# Altium PCB Main.PcbDoc (part 2 of 2)
Units mil, origin at the board's own origin, x right, y up, seen from the top; angles counter-clockwise.
Board outline 5500 x 3500 mil, 4 copper layers (Top Layer, Gnd 1, Interconnects, Gnd 2), stack 64.6 mil thick; 166 components, 135 nets, 540 pads, 1158 vias.
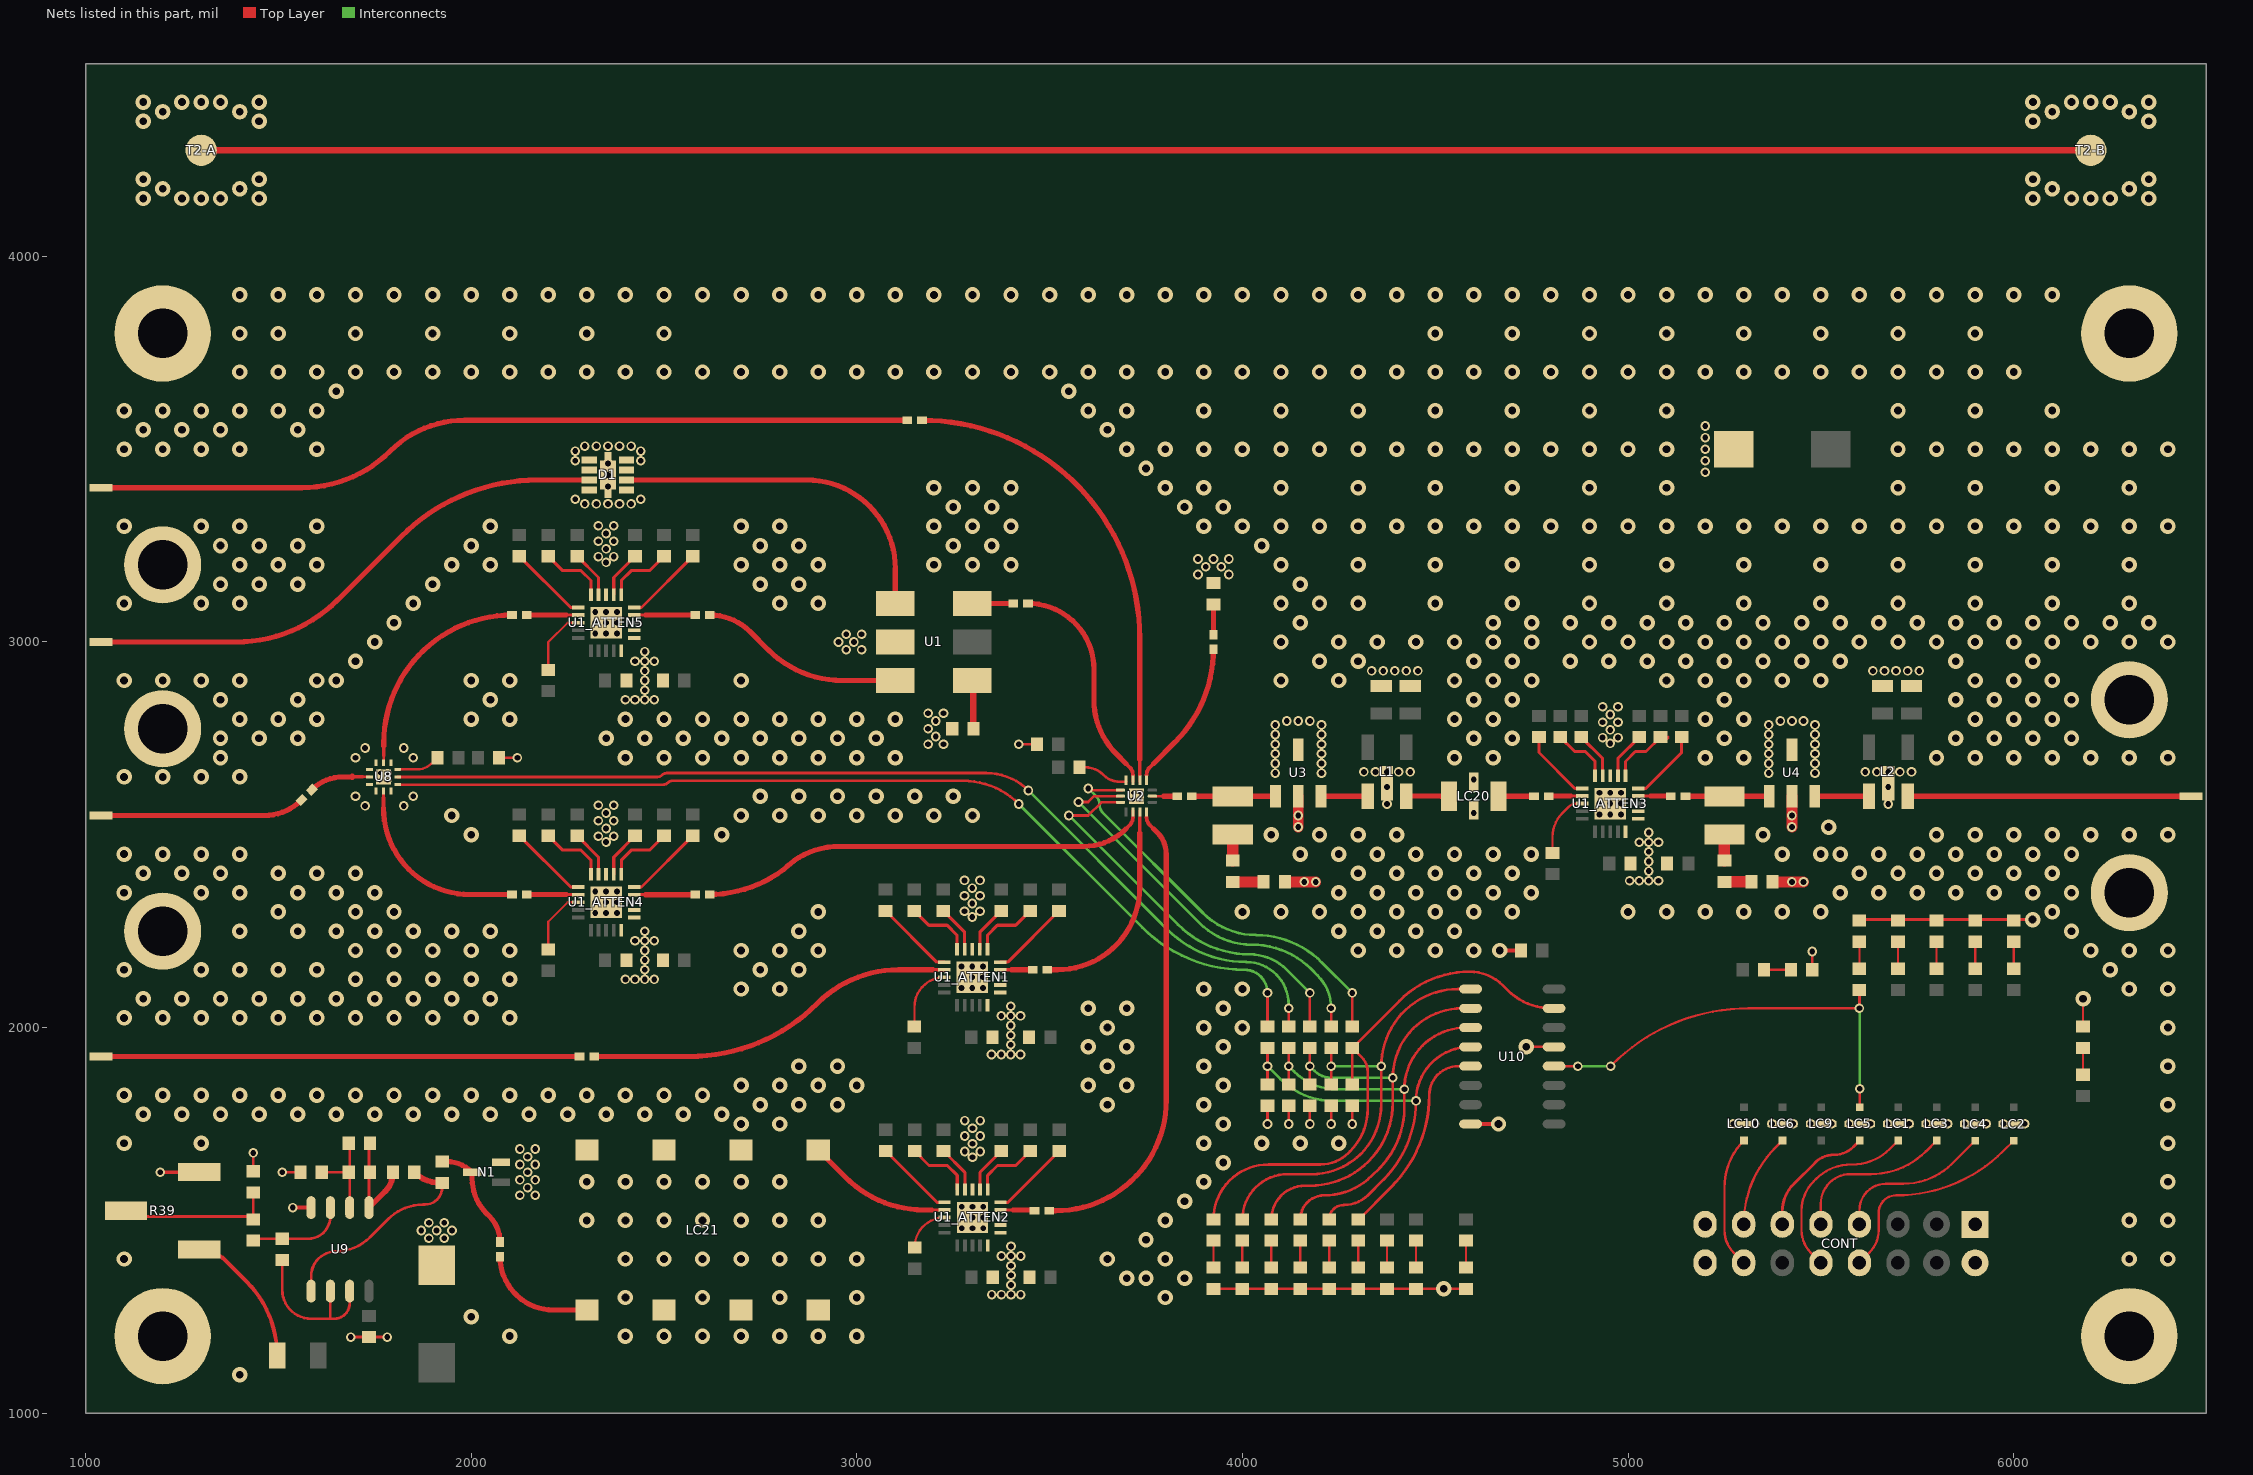
[diagram p4: the nets of this part, all layers, seen from the top]

## Via types
v1: diameter 40, hole 20, Top Layer to Gnd 2, tented both sides, 760 vias
v2: diameter 25, hole 15, Top Layer to Gnd 2, tented both sides, 345 vias
v3: diameter 25, hole 15, Top Layer to Gnd 2, 45 vias
v4: diameter 20, hole 10, Top Layer to Gnd 2, tented both sides, 4 vias
v5: diameter 22, hole 10, Top Layer to Gnd 2, tented bottom, 4 vias

## Nets (pads, with @x,y where several pads share a name; then routed paths per layer and width w, separated by ;. In a path a pad name is that pad's centre, name@x,y a point inside that pad or via, vN(x,y) a via of type N, cw(c..) or ccw(c..) an arc to the next point about the centre after c; other vN are vias at no path point) (continued)
GND: C4_ATTEN1.1 C4_ATTEN2.1 C4_ATTEN3.1 C4_ATTEN4.1 C4_ATTEN5.1 C6_ATTEN1.1 C6_ATTEN2.1 C6_ATTEN3.1 C6_ATTEN4.1 C6_ATTEN5.1 C9.1 C10.1 C12.1 C13.1 C18.1 C20.1 C21.1 C22.1 C23.1 C24.1 C25.1 C30.1 C32.1 C34.1 C40.2 C41.2 C60.2 C61.2 CONT.1 CONT.2 CONT.15 CONT.16 D1.1 D1.3 D1.4 D1.5 D1.6 D1.8 D1.9 D1.10 DP1.2 DP2.2 DP3.2 DP4.2 DP5.2 DP6.2 DP7.2 DP8.2 DP9.2 DP10.2 DP11.2 DP12.2 DP13.2 DP14.2 DP15.2 DP16.2 L1.5 L2.5 LC1.2 LC2.2 LC3.2 LC4.2 LC5.2 LC6.2 LC9.2 LC10.2 LC20.2 LC20.4 LC21.2 LC21.3 LC21.4 LC21.5 LC21.6 LC21.7 N1.2 pad.0 pad.1 R1.1 R2.1 R37.1 R39.3 T2-A.2 T2-A.3 T2-A.4 T2-A.5 T2-B.2 T2-B.3 T2-B.4 T2-B.5 U1.2 U1_ATTEN1.10 U1_ATTEN1.11 U1_ATTEN1.12 U1_ATTEN1.18 U1_ATTEN1.21 U1_ATTEN2.10 U1_ATTEN2.11 U1_ATTEN2.12 U1_ATTEN2.18 U1_ATTEN2.21 U1_ATTEN3.10 U1_ATTEN3.11 U1_ATTEN3.12 U1_ATTEN3.18 U1_ATTEN3.21 U1_ATTEN4.10 U1_ATTEN4.11 U1_ATTEN4.12 U1_ATTEN4.18 U1_ATTEN4.21 U1_ATTEN5.10 U1_ATTEN5.11 U1_ATTEN5.12 U1_ATTEN5.18 U1_ATTEN5.21 U2.15 U3.2 U3.4 U4.2 U4.4 U8.1 U8.3 U8.4 U8.6 U8.10 U8.12 U8.13 U9.4 U10.8 U10.13 | length 2415.4
  Top Layer w6: DP1.2@3925,1322.44 DP2.2@4000,1322.44 DP3.2@4075,1322.44 DP4.2@4150,1322.44 DP6.2@4300,1322.44 DP7.2@4375,1322.44 DP8.2@4450,1322.44 v1(4522.44,1322.44) DP9.2@4580,1322.44 ; v1(4735.83,1950) U10.13@4808.27,1950 ; DP10.2@6180,2002.56 v1(6180,2075)
  Top Layer w7: C32.1@1435,1627.56 v2(1435,1675) ; v2(1510,1625) R37.1@1557.44,1625 ; v2(1687.56,1197.44) C34.1@1735,1197.44 v2(1782.44,1197.44) ; C30.1@2072.56,2700 v2(2120,2700) ; v2(3420,2735) C20.1@3467.44,2735 ; v2(4065,1750) C24.1@4065,1797.44 ; v2(4120,1750) C25.1@4120,1797.44 ; v2(4175,1750) C23.1@4175,1797.44 ; v2(4230,1750) C22.1@4230,1797.44 ; v2(4285,1750) C21.1@4285,1797.44 ; DP16.2@5477.56,2150 v2(5477.56,2197.44)
  Top Layer w8: DP11.2@5599,2280.12 5674,2280.12 5749,2280.12 5824,2280.12 5899,2280.12 v1(6049,2280.12)
  Top Layer w10: v2(1193.56,1625) R39.3@1295,1625 ; v2(1537.56,1533.27) U9.4@1585,1533.27 ; U10.8@4591.73,1750 v1(4664.17,1750) ; v1(4667.56,2200) C18.1@4722.44,2200
  Top Layer w28: C60.2@4110.12,2377.8 v2(4190.12,2377.8) ; v2(4145,2520) U3.2@4145,2600 ; C61.2@5375,2377.8 v2(5455,2377.8) ; v2(5425,2520) U4.2@5425,2600
  other v1: 1400,1100 2100,1200 2400,1200 2500,1200 2600,1200 2700,1200 2800,1200 2900,1200 3000,1200 2000,1250 2400,1300 2600,1300 2800,1300 3000,1300 3800,1300 3700,1350 3750,1350 3850,1350 1100,1400 2400,1400 2500,1400 2600,1400 2700,1400 2800,1400 2900,1400 3000,1400 3650,1400 3800,1400 6300,1400 6400,1400 3750,1450 2300,1500 2400,1500 2500,1500 2600,1500 2700,1500 2800,1500 2900,1500 3800,1500 6300,1500 6400,1500 3850,1550 2300,1600 2400,1600 2500,1600 2600,1600 2700,1600 2800,1600 3900,1600 6400,1600 3950,1650 1100,1700 1300,1700 3900,1700 4050,1700 4150,1700 4250,1700 6400,1700 2700,1750 2800,1750 3950,1750 1150,1775 1250,1775 1350,1775 1450,1775 1550,1775 1650,1775 1750,1775 1850,1775 1950,1775 2050,1775 2150,1775 2250,1775 2350,1775 2450,1775 2550,1775 2650,1775 2750,1800 2850,1800 2950,1800 3650,1800 3900,1800 6400,1800 1100,1825 1200,1825 1300,1825 1400,1825 1500,1825 1600,1825 1700,1825 1800,1825 1900,1825 2000,1825 2100,1825 2200,1825 2300,1825 2400,1825 2500,1825 2600,1825 2700,1850 2800,1850 2900,1850 3000,1850 3600,1850 3700,1850 3950,1850 2850,1900 2950,1900 3650,1900 3900,1900 6400,1900 3600,1950 3700,1950 3950,1950 3650,2000 3900,2000 4000,2000 6400,2000 1100,2025 1200,2025 1300,2025 1400,2025 1500,2025 1600,2025 1700,2025 1800,2025 1900,2025 2000,2025 2100,2025 3600,2050 3700,2050 3950,2050 1150,2075 1250,2075 1350,2075 1450,2075 1550,2075 1650,2075 1750,2075 1850,2075 1950,2075 2050,2075 2700,2100 2800,2100 3900,2100 4000,2100 6300,2100 6400,2100 1700,2125 1800,2125 1900,2125 2000,2125 2100,2125 1100,2150 1300,2150 1400,2150 1500,2150 1600,2150 2750,2150 2850,2150 6250,2150 1700,2200 1800,2200 1900,2200 2000,2200 2100,2200 2700,2200 2800,2200 2900,2200 4300,2200 4400,2200 4500,2200 4600,2200 6200,2200 6300,2200 6400,2200 1400,2250 1550,2250 1650,2250 1750,2250 1850,2250 1950,2250 2050,2250 2850,2250 4250,2250 4350,2250 4450,2250 4550,2250 6150,2250 1500,2300 1700,2300 1800,2300 2900,2300 4000,2300 4100,2300 4200,2300 4300,2300 4400,2300 4500,2300 4600,2300 4700,2300 5000,2300 5100,2300 5200,2300 5300,2300 5400,2300 5500,2300 6100,2300 1100,2350 1300,2350 1400,2350 1550,2350 1650,2350 1750,2350 4250,2350 4350,2350 4450,2350 4550,2350 4650,2350 4749.02,2350 5550,2350 5650,2350 5750,2350 5850,2350 5950,2350 6050,2350 6150,2350 1150,2400 1250,2400 1350,2400 1500,2400 1600,2400 1700,2400 4300,2400 4400,2400 4500,2400 4600,2400 4700,2400 5600,2400 5700,2400 5800,2400 5900,2400 6000,2400 6100,2400 1100,2450 1200,2450 1300,2450 1400,2450 4150,2450 4250,2450 4350,2450 4450,2450 4550,2450 4650,2450 4749.02,2450 5400,2450 5500,2450 5550,2450 5650,2450 5750,2450 5850,2450 5950,2450 6050,2450 6150,2450 2000,2500 2650,2500 4075,2500 4200,2500 4300,2500 4400,2500 5350,2500 5800,2500 5900,2500 6000,2500 6100,2500 6200,2500 6300,2500 6400,2500 5520,2520 1950,2550 2700,2550 2800,2550 2900,2550 3000,2550 3100,2550 3200,2550 3300,2550 2750,2600 2850,2600 2950,2600 3050,2600 3150,2600 3250,2600 1100,2650 1200,2650 1300,2650 1400,2650 1350,2700 2400,2700 2500,2700 2600,2700 2700,2700 2800,2700 2900,2700 3000,2700 3100,2700 4550,2700 4650,2700 5200,2700 5300,2700 5800,2700 5900,2700 6000,2700 6100,2700 6200,2700 6300,2700 6400,2700 1350,2750 1450,2750 1550,2750 2350,2750 2450,2750 2550,2750 2650,2750 2750,2750 2850,2750 2950,2750 3050,2750 4600,2750 4700,2750 5250,2750 5850,2750 5950,2750 6050,2750 6150,2750 1400,2800 1500,2800 1600,2800 2000,2800 2100,2800 2400,2800 2500,2800 2600,2800 2700,2800 2800,2800 2900,2800 3000,2800 3100,2800 4550,2800 4650,2800 5200,2800 5300,2800 5900,2800 6000,2800 6100,2800 1350,2850 1550,2850 2050,2850 4600,2850 4700,2850 5250,2850 5850,2850 5950,2850 6050,2850 6150,2850 1100,2900 1200,2900 1300,2900 1400,2900 1600,2900 1650,2900 2000,2900 2100,2900 2700,2900 4100,2900 4250,2900 4550,2900 4650,2900 4750,2900 5100,2900 5200,2900 5300,2900 5400,2900 5500,2900 5900,2900 6000,2900 6100,2900 1700,2950 4200,2950 4300,2950 4600,2950 4700,2950 4850,2950 4950,2950 5050,2950 5150,2950 5250,2950 5350,2950 5450,2950 5550,2950 5850,2950 6050,2950 1750,3000 4100,3000 4250,3000 4350,3000 4450,3000 4550,3000 4650,3000 4750,3000 4900,3000 5000,3000 5100,3000 5200,3000 5300,3000 5400,3000 5500,3000 5600,3000 5700,3000 5800,3000 5900,3000 6000,3000 6100,3000 6200,3000 6300,3000 6400,3000 1800,3050 4150,3050 4650,3050 4750,3050 4850,3050 4950,3050 5050,3050 5150,3050 5250,3050 5350,3050 5450,3050 5550,3050 5650,3050 5750,3050 5850,3050 5950,3050 6050,3050 6150,3050 6250,3050 6350,3050 1100,3100 1300,3100 1400,3100 1850,3100 2800,3100 2900,3100 4100,3100 4200,3100 4300,3100 4500,3100 4700,3100 4900,3100 5100,3100 5300,3100 5500,3100 5700,3100 5900,3100 6100,3100 6300,3100 1350,3150 1450,3150 1550,3150 1900,3150 2750,3150 2850,3150 4150,3150 1400,3200 1500,3200 1600,3200 1950,3200 2050,3200 2700,3200 2800,3200 2900,3200 3200,3200 3300,3200 3400,3200 4100,3200 4300,3200 4500,3200 4700,3200 4900,3200 5100,3200 5300,3200 5500,3200 5700,3200 5900,3200 6100,3200 6300,3200 1350,3250 1450,3250 1550,3250 2000,3250 2750,3250 2850,3250 3250,3250 3350,3250 4050,3250 1100,3300 1300,3300 1400,3300 1600,3300 2050,3300 2700,3300 2800,3300 3200,3300 3300,3300 3400,3300 3900,3300 4000,3300 4100,3300 4200,3300 4300,3300 4400,3300 4500,3300 4600,3300 4700,3300 4800,3300 4900,3300 5000,3300 5100,3300 5200,3300 5300,3300 5400,3300 5500,3300 5600,3300 5700,3300 5800,3300 5900,3300 6000,3300 6100,3300 6200,3300 6300,3300 6400,3300 3250,3350 3350,3350 3850,3350 3950,3350 3200,3400 3300,3400 3400,3400 3800,3400 3900,3400 4100,3400 4300,3400 4500,3400 4700,3400 4900,3400 5100,3400 5700,3400 5900,3400 6100,3400 6300,3400 3750,3450 1100,3500 1200,3500 1300,3500 1400,3500 1600,3500 3700,3500 3800,3500 3900,3500 4000,3500 4100,3500 4200,3500 4300,3500 4400,3500 4500,3500 4600,3500 4700,3500 4800,3500 4900,3500 5000,3500 5100,3500 5700,3500 5800,3500 5900,3500 6000,3500 6100,3500 6200,3500 6300,3500 6400,3500 1150,3550 1250,3550 1350,3550 1550,3550 3650,3550 1100,3600 1200,3600 1300,3600 1400,3600 1500,3600 1600,3600 3600,3600 3700,3600 3900,3600 4100,3600 4300,3600 4500,3600 4700,3600 4900,3600 5100,3600 5700,3600 5900,3600 6100,3600 1650,3650 3550,3650 1400,3700 1500,3700 1600,3700 1700,3700 1800,3700 1900,3700 2000,3700 2100,3700 2200,3700 2300,3700 2400,3700 2500,3700 2600,3700 2700,3700 2800,3700 2900,3700 3000,3700 3100,3700 3200,3700 3300,3700 3400,3700 3500,3700 3600,3700 3700,3700 3800,3700 3900,3700 4000,3700 4100,3700 4200,3700 4300,3700 4400,3700 4500,3700 4600,3700 4700,3700 4800,3700 4900,3700 5000,3700 5100,3700 5200,3700 5300,3700 5400,3700 5500,3700 5600,3700 5700,3700 5800,3700 5900,3700 6000,3700 1400,3800 1500,3800 1700,3800 1900,3800 2100,3800 2300,3800 2500,3800 4500,3800 4700,3800 4900,3800 5100,3800 5300,3800 5500,3800 5700,3800 5900,3800 1400,3900 1500,3900 1600,3900 1700,3900 1800,3900 1900,3900 2000,3900 2100,3900 2200,3900 2300,3900 2400,3900 2500,3900 2600,3900 2700,3900 2800,3900 2900,3900 3000,3900 3100,3900 3200,3900 3300,3900 3400,3900 3500,3900 3600,3900 3700,3900 3800,3900 3900,3900 4000,3900 4100,3900 4200,3900 4300,3900 4400,3900 4500,3900 4600,3900 4700,3900 4800,3900 4900,3900 5000,3900 5100,3900 5200,3900 5300,3900 5400,3900 5500,3900 5600,3900 5700,3900 5800,3900 5900,3900 6000,3900 6100,3900 1150,4150 1250,4150 1300,4150 1350,4150 1450,4150 6050,4150 6150,4150 6200,4150 6250,4150 6350,4150 1150,4200 1450,4200 6050,4200 6350,4200 1150,4350 1450,4350 6050,4350 6350,4350 1150,4400 1250,4400 1300,4400 1350,4400 1450,4400 6050,4400 6150,4400 6200,4400 6250,4400 6350,4400
  other v2: 3350,1307.56 3375,1307.56 3400,1307.56 3425,1307.56 3400,1332.56 3400,1357.56 3400,1382.56 3375,1407.56 3400,1407.56 3425,1407.56 3400,1432.56 1890.44,1453.79 1930.44,1453.79 1870.44,1473.79 1910.44,1473.79 1950.44,1473.79 1890.44,1493.79 1930.44,1493.79 2126.34,1565 2166.34,1565 2146.34,1585 2126.34,1605 2166.34,1605 2146.34,1625 2126.34,1645 2166.34,1645 3300,1663.86 2146.34,1665 3280,1678.86 3320,1678.86 2126.34,1685 2166.34,1685 3300,1698.86 3280,1718.86 3320,1718.86 3300,1738.86 5273.39,1750.83 5328.5,1750.83 5373.39,1750.83 5428.5,1750.83 5473.39,1750.83 5528.5,1750.83 5573.39,1750.83 5628.5,1750.83 5673.39,1750.83 5728.5,1750.83 5773.39,1750.83 5828.5,1750.83 5873.39,1750.83 5928.5,1750.83 5973.39,1750.83 6028.5,1750.83 3280,1758.86 3320,1758.86 3349.43,1930.33 3374.43,1930.33 3399.43,1930.33 3424.43,1930.33 3399.43,1955.33 3399.43,1980.33 3399.43,2005.33 3374.43,2030.33 3399.43,2030.33 3424.43,2030.33 3399.43,2055.33 2400,2125 2425,2125 2450,2125 2475,2125 2450,2150 2450,2175 2450,2200 2425,2225 2450,2225 2475,2225 2450,2250 3299.43,2286.63 3279.43,2301.63 3319.43,2301.63 3299.43,2321.63 3279.43,2341.63 3319.43,2341.63 3299.43,2361.63 4160.12,2377.8 5425,2377.8 5004,2380.77 5029,2380.77 5054,2380.77 5079,2380.77 3279.43,2381.63 3319.43,2381.63 5054,2405.77 5054,2430.77 5054,2455.77 2350,2481.3 5029,2480.77 5054,2480.77 5079,2480.77 2330,2496.3 2370,2496.3 5054,2505.77 2350,2516.3 2330,2536.3 2370,2536.3 4145,2550 5425,2550 2350,2556.3 4600,2556.5 1725,2575 1825,2575 2330,2576.3 2370,2576.3 4375,2580 5675,2580 1700,2600 1850,2600 4375,2624 5675,2624 4600,2643.5 4085,2660 4205,2660 5365,2660 5485,2660 4315,2663 4345,2663 4375,2663 4405,2663 4435,2663 5615,2663 5645,2663 5675,2663 5705,2663 5735,2663 4085,2685 4205,2685 5365,2685 5485,2685 1700,2700 1850,2700 4085,2710 4205,2710 5365,2710 5485,2710 1725,2725 1825,2725 3185,2735 3225,2735 4085,2735 4205,2735 5365,2735 5485,2735 4954,2737.07 4934,2752.07 4974,2752.07 3205,2755 4085,2760 4205,2760 5365,2760 5485,2760 4954,2772.07 3185,2775 4085,2785 4205,2785 5365,2785 5485,2785 4934,2792.07 4974,2792.07 3205,2795 4115.02,2795 4145.02,2795 4175.02,2795 5395.02,2795 5425.02,2795 5455.02,2795 4954,2812.07 3185,2815 3225,2815 4934,2832.07 4974,2832.07 2400,2850 2425,2850 2450,2850 2475,2850 2450,2875 2450,2900 2450,2925 4335,2925 4365,2925 4395,2925 4425,2925 4455,2925 5635,2925 5665,2925 5695,2925 5725,2925 5755,2925 2425,2950 2450,2950 2475,2950 2450,2975 2972.56,2980 3012.56,2980 2952.56,3000 2992.56,3000 2972.56,3020 3012.56,3020 3885,3175 3965,3175 3905,3195 3945,3195 2350,3206.3 3885,3215 3925,3215 3965,3215 2330,3221.3 2370,3221.3 2350,3241.3 2330,3261.3 2370,3261.3 2350,3281.3 2330,3301.3 2370,3301.3 2294.71,3357.99 2324.71,3357.99 2354.71,3357.99 2384.71,3357.99 2414.71,3357.99 2269.71,3369.99 2439.71,3369.99 2354.71,3402.99 2354.71,3432.99 5200.12,3440 2354.71,3462.99 2269.71,3469.99 2439.71,3469.99 5200.12,3470 2269.71,3494.99 2439.71,3494.99 5200.12,3500 2294.71,3507.99 2324.71,3507.99 2354.71,3507.99 2384.71,3507.99 2414.71,3507.99 5200.12,3530 5200.12,3560
  other v3: 3272,1479.56 3300,1479.56 3328,1479.56 3272,1507.56 3300,1507.56 3328,1507.56 3272,1535.56 3300,1535.56 3328,1535.56 3271.43,2102.33 3299.43,2102.33 3327.43,2102.33 3271.43,2130.33 3299.43,2130.33 3327.43,2130.33 3271.43,2158.33 3299.43,2158.33 3327.43,2158.33 2322,2297 2350,2297 2378,2297 2322,2325 2350,2325 2378,2325 2322,2353 2350,2353 2378,2353 4926,2552.77 4954,2552.77 4982,2552.77 4926,2580.77 4954,2580.77 4982,2580.77 4926,2608.77 4954,2608.77 4982,2608.77 2322,3022 2350,3022 2378,3022 2322,3050 2350,3050 2378,3050 2322,3078 2350,3078 2378,3078
  other v4: 1763,2640 1783,2640 1763,2660 1783,2660
  other v5: 3716.13,2591.13 3733.87,2591.13 3716.13,2608.87 3733.87,2608.87
LV_CS_1: CONT.8 LC2.3 | length 564.5
  Top Layer w6: CONT.8@5600,1390 5625.25,1415.25 ; 5625.28,1415.28 ccw(c5565.5,1475) 5650,1475 5650,1520 cw(c5695,1520) 5651.49,1531.49 cw(c5695,1520) 5683.51,1563.51 cw(c5695,1520) 5695,1565 ccw(c5695,1959.26) 5973.73,1680.42 ccw(c5695,1959.26) 5973.78,1680.48 LC2.3@6000,1706.69
LV_CS_2: CONT.7 LC4.3 | length 414.3
  Top Layer w6: CONT.7@5600,1490 5600,1526.72 cw(c5668.28,1526.72) 5620,1575 cw(c5668.28,1526.72) 5668.28,1595 5714.15,1595 ccw(c5714.15,1774.02) 5840.71,1647.41 ; 5840.74,1647.43 LC4.3@5900,1706.69
LV_CS_3: CONT.10 LC1.3 | length 488.5
  Top Layer w6: CONT.10@5500,1390 5474.75,1415.25 cw(c5534.5,1475) 5450,1475 5450,1525 cw(c5558.64,1525) 5481.82,1601.82 5487.5,1607.5 cw(c5578.03,1516.97) 5578.03,1645 5581.69,1645 ccw(c5581.69,1781.87) 5678.44,1685.05 ccw(c5581.69,1781.87) 5678.47,1685.09 LC1.3@5700.63,1707.24
LV_CS_4: CONT.9 LC3.3 | length 425.1
  Top Layer w6: CONT.9@5500,1490 5500,1543.18 cw(c5576.82,1543.18) 5522.49,1597.49 cw(c5576.82,1543.18) 5576.82,1620 5630,1620 ccw(c5630,1821.31) 5772.31,1678.92 ccw(c5630,1821.31) 5772.35,1678.96 LC3.3@5800.63,1707.24
LV_CS_5: CONT.14 LC10.3 | length 347.9
  Top Layer w6: 5274.72,1415.28 cw(c5334.5,1475) 5250,1475 5250,1585.01 cw(c5422.86,1585.01) LC10.3@5300.63,1707.24 ; 5274.75,1415.25 CONT.14@5300,1390
MOSI: CONT.13 LC6.3 | length 246.8
  Top Layer w6: CONT.13@5300,1490 cw(c5581.53,1490) 5382.42,1689.04 cw(c5581.53,1490) 5382.46,1689.07 LC6.3@5400.63,1707.24
NetC1_1: C1.1 TONE.1 | length 1241
  Top Layer w13.45: TONE.1@1040,1925 C1.1@2280.98,1925
NetC1_2: C1.2 U1_ATTEN1.2 | length 967.9
  Top Layer w8: 3197.06,2150.02 U1_ATTEN1.2@3226.79,2150.02
  Top Layer w13.45: C1.2@2319.02,1925 2565.29,1925 ccw(c2565.29,2395.06) 2897.68,2062.68 cw(c3108.53,1851.83) 3108.53,2150.02 3197.06,2150.02
NetC2_1: C2.1 U1_ATTEN1.14 | length 74.7
  Top Layer w8: U1_ATTEN1.14@3372.06,2150.02 3401.79,2150.02
  Top Layer w13.45: 3401.79,2150.02 C2.1@3446.8,2150.02
NetC2_2: C2.2 U2.10 | length 560.8
  Top Layer w7: 3733.86,2545 U2.10@3733.86,2562.6
  Top Layer w10: 3733.86,2505 3733.86,2545
  Top Layer w13.45: C2.2@3494.02,2150 3520.28,2150 ccw(c3520.28,2363.58) 3733.86,2363.58 3733.86,2505
NetC3_1: C3.1 U1.6 | length 100
  Top Layer w13.45: U1.6@3300,3100 C3.1@3400,3100
NetC3_2: C3.2 U2.3 | length 592.3
  Top Layer w7: U2.3@3716.14,2637.4 3716.14,2655
  Top Layer w10: 3697.72,2685 3707.96,2674.76 cw(c3688.2,2655) 3716.14,2655
  Top Layer w13.45: C3.2@3444.02,3100 cw(c3444.02,2929.02) 3615,2929.02 3615,2850 ccw(c3813.65,2850) 3673.18,2709.53 3697.72,2685
NetC4_1: C4.1 R2.2 | length 78.4
  Top Layer w13.45: C4.1@3925,3019.02 R2.2@3925,3097.44
NetC4_2: C4.2 U2.1 | length 399.6
  Top Layer w7: U2.1@3751.57,2637.4 3751.57,2655
  Top Layer w10: 3751.57,2655 cw(c3779.52,2655) 3759.76,2674.76 3770,2685
  Top Layer w13.45: 3770,2685 3825.31,2740.31 ccw(c3584.63,2980.98) C4.2@3925,2980.98
NetC5_1: C5.1 N1.3 R3.1 | length 286.4
  Top Layer w13.45: R3.1@1936.07,1652.56 cw(c1936.07,1558.47) N1.3@2002.6,1625 2002.6,1608.3 ccw(c2130.3,1608.3) 2040,1518 2047.43,1510.57 cw(c1980.88,1444.02) C5.1@2075,1444.02
  Top Layer w15: R3.1@1925,1652.56 R3.1@1936.07,1652.56
NetC5_2: C5.2 LC21.1 | length 304
  Top Layer w13.45: C5.2@2075,1405.98 ccw(c2213.48,1405.98) 2213.48,1267.5 LC21.1@2300,1267.5
NetC6_1: C6.1 U1_ATTEN2.14 | length 74.7
  Top Layer w8: U1_ATTEN2.14@3372.64,1527.24 3402.36,1527.24
  Top Layer w13.45: 3404.98,1527.24 C6.1@3450,1527.24
NetC6_2: C6.2 U2.11 | length 1234.7
  Top Layer w7: 3751.57,2545 U2.11@3751.57,2562.6
  Top Layer w10: 3751.57,2545 ccw(c3779.52,2545) 3759.76,2525.24 3770,2515
  Top Layer w13.45: C6.2@3499.02,1525 3515.52,1525 ccw(c3515.52,1812.2) 3802.72,1812.2 3802.72,2450 ccw(c3724.78,2450) 3779.89,2505.11 3770,2515
NetC7_1: C7.1 EMI_IN.1 | length 2137.8
  Top Layer w13.45: EMI_IN.1@1040,3400 1560.65,3400 ccw(c1560.65,3724.35) 1790,3495 cw(c1983.14,3301.86) 1983.14,3575 C7.1@3130.98,3575
NetC7_2: C7.2 U2.2 | length 1260
  Top Layer w7: U2.2@3733.86,2637.4 3733.86,2655
  Top Layer w10: 3733.86,2655 3733.86,2695
  Top Layer w13.45: C7.2@3169.02,3575 cw(c3169.02,3010.16) 3733.86,3010.16 3733.86,2695
NetC8_1: C8.1 U2.13 | length 68.6
  Top Layer w7: U2.13@3762.4,2600 3795,2600
  Top Layer w13.45: 3795,2600 C8.1@3830.98,2600
NetC8_2: C8.2 L3.1 U3.1 | length 217
  Top Layer w13.45: C8.2@3869.02,2600 U3.1@4086,2600
NetC14_1: C14.1 U1_ATTEN3.14 | length 81.7
  Top Layer w8: U1_ATTEN3.14@5026.64,2600.46 5056.36,2600.46
  Top Layer w13.45: 5058.98,2600.46 C14.1@5110.98,2600.46
NetC14_2: C14.2 L4.1 U4.1 | length 217
  Top Layer w13.45: C14.2@5149.02,2600 5293.03,2600.01 U4.1@5366,2600
NetC15_1: C15.1 U8.11 | length 572.4
  Top Layer w7: U8.11@1773.43,2687.4 1773.43,2705
  Top Layer w10: 1773.43,2705 1773.43,2731.06
  Top Layer w13.45: 1773.43,2731.06 1773.43,2737.44 cw(c2105.98,2737.44) C15.1@2105.98,3070
NetC15_2: C15.2 U1_ATTEN5.2 | length 133.7
  Top Layer w8: 2247.64,3069.68 U1_ATTEN5.2@2277.36,3069.68
  Top Layer w13.45: C15.2@2144.02,3070 2247.64,3070
  Top Layer w13.96: C15.2@2144.02,3069.68 C15.2@2144.02,3070
NetC16_1: C16.1 U1_ATTEN5.14 | length 158
  Top Layer w8: U1_ATTEN5.14@2422.64,3069.68 2452.36,3069.68
  Top Layer w13.45: 2452.36,3069.68 C16.1@2580.67,3069.68
NetC16_2: C16.2 U1.3 | length 533.3
  Top Layer w13.45: C16.2@2619.02,3070 cw(c2619.02,2922.77) 2723.12,3026.88 2770,2980 ccw(c2963.14,3173.14) 2963.14,2900 U1.3@3100,2900
NetC17_1: C17.1 U8.5 | length 504.9
  Top Layer w7: 1772.57,2595 U8.5@1772.57,2612.6
  Top Layer w10: 1772.57,2568.94 1772.57,2595
  Top Layer w13.45: 1772.57,2568.93 ccw(c1996.52,2568.94) 1996.52,2345 C17.1@2105.98,2345
NetC17_2: C17.2 U1_ATTEN4.2 | length 133.3
  Top Layer w8: 2247.64,2344.68 U1_ATTEN4.2@2277.36,2344.68
  Top Layer w13.45: C17.2@2144.02,2345 2247.64,2345
NetC19_1: C19.1 U1_ATTEN4.14 | length 158
  Top Layer w8: U1_ATTEN4.14@2422.64,2344.68 2452.36,2344.68
  Top Layer w13.45: 2452.36,2344.68 C19.1@2580.67,2344.68
NetC19_2: C19.2 U2.9 | length 1178.2
  Top Layer w7: 3716.14,2545 U2.9@3716.14,2562.6
  Top Layer w10: 3697.72,2515 3707.96,2525.24 ccw(c3688.2,2545) 3716.14,2545
  Top Layer w13.45: C19.2@2615.65,2345 ccw(c2615.65,2669.35) 2810.94,2410.38 cw(c2954.87,2266.45) 2837.56,2432.8 cw(c2954.87,2266.45) 2954.87,2470 3589.19,2470 ccw(c3589.19,2623.37) 3697.64,2514.92
NetC27_1: C27.1 OSC.1 | length 530.5
  Top Layer w13.45: OSC.1@1040,2550 1463.67,2550 ccw(c1463.67,2685.99) C27.1@1559.83,2589.83
NetC27_2: C27.2 U8.2 | length 158.2
  Top Layer w7: 1718,2650.43 U8.2@1735.6,2650.43
  Top Layer w10: 1691.94,2650.43 1718,2650.43
  Top Layer w13.45: C27.2@1586.72,2616.72 cw(c1667.06,2536.39) 1667.06,2650 1691.94,2650
  Top Layer w17: 1691.94,2650 1691.94,2650.43
NetC28_1: C28.1 LC20.3 | length 92
  Top Layer w13.45: LC20.3@4664,2600 C28.1@4755.98,2600
NetC28_2: C28.2 U1_ATTEN3.2 | length 86.4
  Top Layer w8: 4851.64,2600.46 U1_ATTEN3.2@4881.36,2600.46
  Top Layer w13.45: C28.2@4795,2600.46 4851.64,2600.46
NetC31_1: C31.1 R32.1 R37.2 U9.2 | length 240.2
  Top Layer w7: R37.2@1612.56,1625 C31.1@1682.44,1625 C31.1@1685,1625 ; R32.1@1682.44,1700 1685,1697.44 C31.1@1685,1625 ; U9.2@1685,1533.27 C31.1@1685,1625
NetC31_2: C31.2 R32.2 R36.2 U9.1 | length 282.3
  Top Layer w7: U9.1@1735,1533.27 1735,1697.44 R32.2@1737.56,1700
  Top Layer w15: U9.1@1735,1533.27 1776.73,1575 ccw(c1726.73,1625) R36.2@1797.44,1625
NetC32_2: C32.2 R33.1 R39.2 | length 409.2
  Top Layer w7: R39.2@1105,1525 1120,1510 1427.56,1510 R33.1@1435,1502.56 C32.2@1435,1572.44
NetC60_1: C60.1 R60.2 | length 80
  Top Layer w28: R60.2@3975,2377.8 C60.1@4055,2377.8
NetC61_1: C61.1 R61.2 | length 69.9
  Top Layer w30: R61.2@5250,2377.8 C61.1@5319.88,2377.8
NetD1_2: D1.2 IN.1 | length 1407.4
  Top Layer w13.45: IN.1@1040,3000 1390,3000 ccw(c1390,3374.2) 1654.6,3109.6 1818.55,3273.55 cw(c2172.11,2920) 2172.11,3420 D1.2@2311.01,3420
NetD1_7: D1.7 U1.1 | length 922.9
  Top Layer w13.45: D1.7@2398.41,3420 2870,3420 cw(c2870,3190) 3100,3190 U1.1@3100,3100
NetDP1_1: DP1.1 RL1.2 | length 69.9
  Top Layer w6: DP1.1@3925,1377.56 RL1.2@3925,1447.44
NetDP2_1: DP2.1 RL2.2 | length 69.9
  Top Layer w6: DP2.1@4000,1377.56 RL2.2@4000,1447.44
NetDP3_1: DP3.1 RL3.2 | length 69.9
  Top Layer w6: DP3.1@4075,1377.56 RL3.2@4075,1447.44
NetDP4_1: DP4.1 RL4.2 | length 69.9
  Top Layer w6: DP4.1@4150,1377.56 RL4.2@4150,1447.44
NetDP5_1: DP5.1 RL5.2 | length 69.9
  Top Layer w6: DP5.1@4225,1377.56 RL5.2@4225,1447.44
NetDP6_1: DP6.1 RL6.2 | length 69.9
  Top Layer w6: DP6.1@4300,1377.56 RL6.2@4300,1447.44
NetDP7_1: DP7.1 RL7.2 | length 69.9
  Top Layer w6: DP7.1@4375,1377.56 RL7.2@4375,1447.44
NetDP8_1: DP8.1 RL8.2 | length 69.9
  Top Layer w6: DP8.1@4450,1377.56 RL8.2@4450,1447.44
NetDP9_1: DP9.1 RL9.2 | length 69.9
  Top Layer w6: DP9.1@4580,1377.56 RL9.2@4580,1447.44
NetDP10_1: DP10.1 RL10.2 | length 69.9
  Top Layer w6: RL10.2@6180,1877.56 DP10.1@6180,1947.44
NetDP11_1: DP11.1 RL11.2 | length 69.9
  Top Layer w6: RL11.2@5600,2152.56 DP11.1@5600,2222.44
NetDP12_1: DP12.1 RL12.2 | length 69.9
  Top Layer w6: RL12.2@5800,2152.56 DP12.1@5800,2222.44
NetDP13_1: DP13.1 RL13.2 | length 69.9
  Top Layer w6: RL13.2@5900,2152.56 DP13.1@5900,2222.44
NetDP14_1: DP14.1 RL14.2 | length 69.9
  Top Layer w6: RL14.2@6000,2152.56 DP14.1@6000,2222.44
NetDP15_1: DP15.1 RL15.2 | length 69.9
  Top Layer w6: RL15.2@5700,2152.56 DP15.1@5700,2222.44
NetDP16_1: DP16.1 RL16.2 | length 69.9
  Top Layer w6: RL16.2@5352.56,2150 DP16.1@5422.44,2150
NetL1_1: L1.1 U3.3 | length 121
  Top Layer w13.45: U3.3@4204,2600 L1.1@4325,2600
NetL1_2: L1.2 LC20.1 | length 90
  Top Layer w13.45: L1.2@4425,2600.46 4515,2600
NetL2_1: L2.1 U4.3 | length 126
  Top Layer w13.45: U4.3@5484,2600 L2.1@5610,2600
NetL2_2: L2.2 OUT.1 | length 735
  Top Layer w13.45: L2.2@5725,2600 5968.7,2600.01 OUT.1@6460,2600
NetL3_2: L3.2 R60.1 | length 68.1
  Top Layer w30: R60.1@3975,2432.91 L3.2@3975,2500.98
NetL4_2: L4.2 R61.1 | length 68.1
  Top Layer w30: R61.1@5250,2432.91 L4.2@5250,2500.98
NetLC21_8: LC21.8 U1_ATTEN2.2 | length 376.7
  Top Layer w8: 3197.64,1527.24 U1_ATTEN2.2@3227.36,1527.24
  Top Layer w13.45: LC21.8@2900,1682.5 2971.29,1611.21 ccw(c3174,1813.92) 3174,1527.24 3195.02,1527.24
NetR1_2: R1.2 U1.4 | length 118.8
  Top Layer w17: R1.2@3302.56,2775 U1.4@3302.56,2893.82
NetR1_ATTEN1_1: R1_ATTEN1.1 U1_ATTEN1.17 | length 122.7
  Top Layer w8: U1_ATTEN1.17@3319.11,2202.97 3319.11,2247.46 R1_ATTEN1.1@3374.43,2302.77
NetR1_ATTEN2_1: R1_ATTEN2.1 U1_ATTEN2.17 | length 122.7
  Top Layer w8: U1_ATTEN2.17@3319.69,1580.2 3319.69,1624.69 R1_ATTEN2.1@3375,1680
NetR1_ATTEN3_1: R1_ATTEN3.1 U1_ATTEN3.17 | length 122.7
  Top Layer w8: U1_ATTEN3.17@4973.69,2653.41 4973.69,2697.9 R1_ATTEN3.1@5029,2753.21
NetR1_ATTEN4_1: R1_ATTEN4.1 U1_ATTEN4.17 | length 122.7
  Top Layer w8: U1_ATTEN4.17@2369.68,2397.64 2369.68,2442.13 R1_ATTEN4.1@2425,2497.44
NetR1_ATTEN5_1: R1_ATTEN5.1 U1_ATTEN5.17 | length 122.7
  Top Layer w8: U1_ATTEN5.17@2369.68,3122.64 2369.68,3167.13 R1_ATTEN5.1@2425,3222.44
NetR2_ATTEN1_1: R2_ATTEN1.1 U1_ATTEN1.15 | length 207.5
  Top Layer w8: U1_ATTEN1.15@3372.06,2169.7 3391.35,2169.7 R2_ATTEN1.1@3524.43,2302.77
NetR2_ATTEN2_1: R2_ATTEN2.1 U1_ATTEN2.15 | length 207.5
  Top Layer w8: U1_ATTEN2.15@3372.64,1546.93 3391.93,1546.93 R2_ATTEN2.1@3525,1680
NetR2_ATTEN3_1: R2_ATTEN3.1 U1_ATTEN3.15 | length 190.9
  Top Layer w8: U1_ATTEN3.15@5026.64,2620.14 5045.93,2620.14 5139,2713.21 R2_ATTEN3.1@5139,2753.21
NetR2_ATTEN4_1: R2_ATTEN4.1 U1_ATTEN4.15 | length 207.5
  Top Layer w8: U1_ATTEN4.15@2422.64,2364.37 2441.93,2364.37 R2_ATTEN4.1@2575,2497.44
NetR2_ATTEN5_1: R2_ATTEN5.1 U1_ATTEN5.15 | length 207.5
  Top Layer w8: U1_ATTEN5.15@2422.64,3089.37 2441.93,3089.37 R2_ATTEN5.1@2575,3222.44
NetR3_2: R3.2 R36.1 U9.5 | length 571.5
  Top Layer w7: U9.5@1585,1316.73 1585,1355 cw(c1650,1355) 1650,1420 ccw(c1650,1543.12) 1737.06,1456.06 1784,1503 cw(c1875.74,1411.26) 1839.22,1535.76 cw(c1875.74,1411.26) 1875.74,1541 1880,1541 ccw(c1880,1586) 1925,1586 R3.2@1925,1597.44
  Top Layer w15: R36.1@1852.56,1625 ccw(c1919.09,1691.53) 1919.09,1597.44 R3.2@1925,1597.44
NetR3_ATTEN1_1: R3_ATTEN1.1 U1_ATTEN1.16 | length 173.5
  Top Layer w8: U1_ATTEN1.16@3338.8,2202.97 3338.8,2239.7 3364.43,2265.33 3411.98,2265.33 R3_ATTEN1.1@3449.43,2302.77
NetR3_ATTEN2_1: R3_ATTEN2.1 U1_ATTEN2.16 | length 173.5
  Top Layer w8: U1_ATTEN2.16@3339.37,1580.2 3339.37,1616.93 3365,1642.56 3412.56,1642.56 R3_ATTEN2.1@3450,1680
NetR3_ATTEN3_1: R3_ATTEN3.1 U1_ATTEN3.16 | length 167.6
  Top Layer w8: U1_ATTEN3.16@4993.37,2653.41 4993.37,2690.14 5019,2715.77 5046.56,2715.77 R3_ATTEN3.1@5084,2753.21 ; R3_ATTEN3.1@5094,2743.21 5104,2753.21
NetR3_ATTEN4_1: R3_ATTEN4.1 U1_ATTEN4.16 | length 173.5
  Top Layer w8: U1_ATTEN4.16@2389.37,2397.64 2389.37,2434.37 2415,2460 2462.56,2460 R3_ATTEN4.1@2500,2497.44
NetR3_ATTEN5_1: R3_ATTEN5.1 U1_ATTEN5.16 | length 173.5
  Top Layer w8: U1_ATTEN5.16@2389.37,3122.64 2389.37,3159.37 2415,3185 2462.56,3185 R3_ATTEN5.1@2500,3222.44
NetR4_ATTEN1_1: R4_ATTEN1.1 U1_ATTEN1.1 | length 207.5
  Top Layer w8: R4_ATTEN1.1@3074.43,2302.77 3207.5,2169.7 U1_ATTEN1.1@3226.79,2169.7
NetR4_ATTEN2_1: R4_ATTEN2.1 U1_ATTEN2.1 | length 207.5
  Top Layer w8: R4_ATTEN2.1@3075,1680 3208.07,1546.93 U1_ATTEN2.1@3227.36,1546.93
NetR4_ATTEN3_1: R4_ATTEN3.1 U1_ATTEN3.1 | length 190.9
  Top Layer w8: R4_ATTEN3.1@4769,2753.21 4769,2713.21 4862.07,2620.14 U1_ATTEN3.1@4881.36,2620.14
NetR4_ATTEN4_1: R4_ATTEN4.1 U1_ATTEN4.1 | length 207.5
  Top Layer w8: R4_ATTEN4.1@2125,2497.44 2258.07,2364.37 U1_ATTEN4.1@2277.36,2364.37
NetR4_ATTEN5_1: R4_ATTEN5.1 U1_ATTEN5.1 | length 207.5
  Top Layer w8: R4_ATTEN5.1@2125,3222.44 2258.07,3089.37 U1_ATTEN5.1@2277.36,3089.37
NetR5_ATTEN1_1: R5_ATTEN1.1 U1_ATTEN1.19 | length 122.7
  Top Layer w8: R5_ATTEN1.1@3224.43,2302.77 3279.74,2247.46 U1_ATTEN1.19@3279.74,2202.97
NetR5_ATTEN2_1: R5_ATTEN2.1 U1_ATTEN2.19 | length 122.7
  Top Layer w8: R5_ATTEN2.1@3225,1680 3280.32,1624.68 U1_ATTEN2.19@3280.32,1580.2
NetR5_ATTEN3_1: R5_ATTEN3.1 U1_ATTEN3.19 | length 122.7
  Top Layer w8: R5_ATTEN3.1@4879,2753.21 4934.32,2697.9 U1_ATTEN3.19@4934.32,2653.41
NetR5_ATTEN4_1: R5_ATTEN4.1 U1_ATTEN4.19 | length 122.7
  Top Layer w8: R5_ATTEN4.1@2275,2497.44 2330.32,2442.13 U1_ATTEN4.19@2330.32,2397.64
NetR5_ATTEN5_1: R5_ATTEN5.1 U1_ATTEN5.19 | length 122.7
  Top Layer w8: R5_ATTEN5.1@2275,3222.44 2330.32,3167.13 U1_ATTEN5.19@2330.32,3122.64
NetR6_ATTEN1_1: R6_ATTEN1.1 U1_ATTEN1.20 | length 173.5
  Top Layer w8: R6_ATTEN1.1@3149.43,2302.77 3186.87,2265.33 3234.43,2265.33 3260.06,2239.7 U1_ATTEN1.20@3260.06,2202.97
NetR6_ATTEN2_1: R6_ATTEN2.1 U1_ATTEN2.20 | length 173.5
  Top Layer w8: R6_ATTEN2.1@3150,1680 3187.44,1642.56 3235,1642.56 3260.63,1616.93 U1_ATTEN2.20@3260.63,1580.2
NetR6_ATTEN3_1: R6_ATTEN3.1 U1_ATTEN3.20 | length 153.5
  Top Layer w8: R6_ATTEN3.1@4824,2753.21 4861.44,2715.77 4889,2715.77 4914.63,2690.14 U1_ATTEN3.20@4914.63,2653.41
NetR6_ATTEN4_1: R6_ATTEN4.1 U1_ATTEN4.20 | length 173.5
  Top Layer w8: R6_ATTEN4.1@2200,2497.44 2237.44,2460 2285,2460 2310.63,2434.37 U1_ATTEN4.20@2310.63,2397.64
NetR6_ATTEN5_1: R6_ATTEN5.1 U1_ATTEN5.20 | length 173.5
  Top Layer w8: R6_ATTEN5.1@2200,3222.44 2237.44,3185 2285,3185 2310.63,3159.37 U1_ATTEN5.20@2310.63,3122.64
NetR7_ATTEN1_1: R7_ATTEN1.1 U1_ATTEN1.3 | length 171.9
  Top Layer w6: R7_ATTEN1.1@3149.44,2002.56 3149.44,2052.98 cw(c3226.79,2052.98) 3158.22,2088.78 cw(c3226.79,2052.98) 3190.99,2121.55 cw(c3226.79,2052.98) U1_ATTEN1.3@3226.79,2130.33
NetR7_ATTEN2_1: R7_ATTEN2.1 U1_ATTEN2.3 | length 121.9
  Top Layer w6: R7_ATTEN2.1@3150.02,1429.79 3150.02,1430.21 cw(c3227.36,1430.21) 3158.8,1466.01 cw(c3227.36,1430.21) 3191.56,1498.78 cw(c3227.36,1430.21) U1_ATTEN2.3@3227.36,1507.56
NetR7_ATTEN3_1: R7_ATTEN3.1 U1_ATTEN3.3 | length 154.3
  Top Layer w6: R7_ATTEN3.1@4804.02,2453 4804.02,2493.69 cw(c4892.73,2493.69) 4830,2556.43 4846.81,2573.24 ; 4846.83,2573.25 cw(c4865,2555.05) 4865,2580.77
NetR7_ATTEN4_1: R7_ATTEN4.1 U1_ATTEN4.3 | length 175.6
  Top Layer w6: R7_ATTEN4.1@2200.02,2197.23 2200.02,2274.67 2250.35,2325 U1_ATTEN4.3@2277.36,2325
NetR7_ATTEN5_1: R7_ATTEN5.1 U1_ATTEN5.3 | length 175.6
  Top Layer w6: R7_ATTEN5.1@2200.02,2922.23 2200.02,2999.67 2250.35,3050 U1_ATTEN5.3@2277.36,3050
NetR20_1: R20.1 U2.4 | length 130.9
  Top Layer w7: R20.1@3577.56,2675 3591.72,2675 cw(c3591.72,2606.72) 3640,2655 ccw(c3682.49,2697.49) 3682.49,2637.4 U2.4@3698.43,2637.4
NetR21_1: R21.1 U2.5 | length 1074.7
  Top Layer w7: v2(3600,2620) 3604.25,2615.75 U2.5@3683.66,2615.75 U2.5@3687.6,2615.75 ; R21.1@4285,2002.56 v2(4285,2090)
  Interconnects w7: v2(3600,2620) 3621.16,2598.84 ; 3621.18,2598.82 cw(c3599.82,2577.5) 3630,2577.5 ccw(c3660.18,2577.5) 3638.82,2556.18 ; 3638.84,2556.16 3898.43,2296.57 ccw(c4035,2433.14) 4035,2240 cw(c4035,1998.58) 4205.7,2169.3 v2(4285,2090)
NetR22_1: R22.1 U2.6 | length 1049.3
  Top Layer w7: v2(3575,2585) 3600,2585 3615,2600 U2.6@3687.6,2600 ; R22.1@4230,2002.56 v2(4230,2050)
  Interconnects w7: v2(3575,2585) 3888.43,2271.57 ccw(c4025,2408.14) 4025,2215 cw(c4025,1997.72) 4178.64,2151.36 4195,2135 cw(c4110.5,2050.5) 4230,2050.5 v2(4230,2050)
NetR23_1: R23.1 U2.7 | length 1037.6
  Top Layer w7: v2(3550,2550) 3600,2550 3634.25,2584.25 U2.7@3687.6,2584.25 ; R23.1@4175,2002.56 v2(4175,2090)
  Interconnects w7: v2(3550,2550) 3832.98,2267.02 ccw(c4018.92,2452.97) 4018.92,2190 cw(c4018.92,2054.62) 4114.65,2150.35 v2(4175,2090)
NetR24_2: R24.2 U8.7 | length 2558.1
  Top Layer w7: U8.7@1809.42,2630.32 1809.73,2630 2497.93,2630 ccw(c2497.93,2647.07) 2510,2635 cw(c2522.07,2622.93) 2522.07,2640 3275.15,2640 cw(c3275.15,2435.15) v2(3420,2580) ; R24.2@4065,2002.56 v2(4065,2090)
  Interconnects w7: v2(3420,2580) 3740.4,2259.6 ccw(c4005,2524.2) 4005,2150 cw(c4005,2090) v2(4065,2090)
NetR25_2: R25.2 U8.8 | length 2617.4
  Top Layer w7: U8.8@1809.42,2650 2482.93,2650 ccw(c2482.93,2667.07) 2495,2655 cw(c2507.07,2642.93) 2507.07,2660 3336.36,2660 cw(c3336.36,2506.36) v2(3445,2615) ; R25.2@4120,2002.56 v2(4120,2050)
  Interconnects w7: v2(3445,2615) 3805.15,2254.85 ccw(c4010,2459.71) 4010,2170 cw(c4010,2060) 4120,2060 v2(4120,2050)
NetR31_1: R31.1 U8.9 | length 91.9
  Top Layer w6: U8.9@1809.42,2669.69 1860.69,2669.69 ccw(c1860.69,2721.44) R31.1@1897.28,2684.84
NetR33_2: R33.2 R34.1 U9.3 | length 256
  Top Layer w7: R33.2@1435,1452.56 1577.44,1452.56 ccw(c1577.44,1510.12) 1635,1510.12 U9.3@1635,1533.27
NetR34_2: R34.2 U9.6 U9.7 | length 421.5
  Top Layer w7: R34.2@1510,1397.44 1510,1320 ccw(c1585,1320) 1585,1245 1635,1245 ; U9.6@1635,1316.73 1635,1245 ; U9.7@1685,1316.73 1685,1285 cw(c1645,1285) 1645,1245 1635,1245
NetR35_1: R35.1 R39.1 | length 365.8
  Top Layer w10: R39.1@1295,1425 cw(c1295,1330.85) 1361.58,1397.42 1417.55,1341.45 cw(c1226.1,1150) R35.1@1496.85,1150
NetRL6_1: RL6.1 U10.5 | length 535.3
  Top Layer w7: RL6.1@4300,1502.56 4301.97,1502.56 4386.02,1586.61 ccw(c4148.04,1824.6) 4484.6,1824.6 cw(c4560,1824.6) 4488.48,1848.48 cw(c4560,1824.6) 4536.12,1896.12 cw(c4560,1824.6) 4560,1900 U10.5@4591.73,1900
NetT2-A_1: T2-A.1 T2-B.1 | length 4900
  Top Layer w17: T2-A.1@1300,4275 T2-B.1@6200,4275
SR_LATCH: LC5.1 RL11.1 U10.12 | length 1136.2
  Top Layer w6: v2(4954.85,1900) 4958.41,1903.55 cw(c5311.96,1550) 5311.96,2050 v2(5600,2050)
  Top Layer w7: U10.12@4808.27,1900 v2(4870,1900) ; v2(5600,2050) RL11.1@5600,2097.44 ; LC5.1@5600.63,1793.86 v2(5600.63,1841.3)
  Interconnects w6: v2(4870,1900) v2(4954.85,1900)
  Interconnects w7: v2(5600,2050) 5600.63,2049.37 v2(5600.63,1841.3)
SW_1: CONT.11 LC5.3 | length 324.1
  Top Layer w7: CONT.11@5400,1490 5400,1522.57 cw(c5502.43,1522.57) 5429.98,1594.98 5484.36,1649.36 cw(c5534.19,1599.52) 5534.19,1670 ccw(c5534.19,1740.48) 5584.02,1690.63 ; 5584.03,1690.64 LC5.3@5600.63,1707.24
U2_S1: C23.2 R23.2 RL3.1 U10.2 | length 1176.8
  Top Layer w7: RL3.1@4075,1502.56 cw(c4162.44,1502.56) 4162.44,1590 4175,1590 ccw(c4175,1805) 4390,1805 v2(4390,1870) cw(c4570,1870) 4570,2050 U10.2@4591.73,2050 ; C23.2@4175,1852.56 v2(4175,1900) R23.2@4175,1947.44
  Interconnects w7: v2(4175,1900) 4187.32,1887.68 ccw(c4230,1930.36) 4230,1870 v2(4390,1870)
U2_S2: C22.2 R22.2 RL2.1 U10.1 | length 1200.6
  Top Layer w7: RL2.1@4000,1502.56 cw(c4117.44,1502.56) 4117.44,1620 4180,1620 ccw(c4180,1800) 4360,1800 v2(4360,1900) cw(c4560,1900) 4560,2100 U10.1@4591.73,2100 ; C22.2@4230,1852.56 v2(4230,1900) R22.2@4230,1947.44
  Interconnects w7: v2(4230,1900) v2(4360,1900)
U2_S3: C21.2 R21.2 RL1.1 U10.15 | length 1456
  Top Layer w7: RL1.1@3925,1502.56 cw(c4067.44,1502.56) 4067.44,1645 4202.57,1645 ccw(c4202.57,1747.43) 4274.98,1674.98 4279.04,1679.04 ccw(c4168.08,1790) 4325,1790 4325,1885 ccw(c4270.82,1885) 4309.15,1923.29 R21.2@4285,1947.44 ; C21.2@4285,1852.56 R21.2@4285,1947.44 ; 4675.67,2109.33 ccw(c4589.53,2023.15) 4589.53,2145 ccw(c4589.53,1886.75) 4406.92,2069.36 R21.2@4285,1947.44 ; 4675.69,2109.31 4687.5,2097.5 ccw(c4802.18,2212.18) 4687.55,2097.45 ccw(c4802.18,2212.18) 4802.18,2050 U10.15@4808.27,2050
U8_S2: C25.2 R25.1 RL4.1 U10.3 | length 1160.5
  Top Layer w7: C25.2@4120,1852.56 v2(4120,1900) R25.1@4120,1947.44 ; RL4.1@4150,1502.56 cw(c4212.44,1502.56) 4212.44,1565 ccw(c4212.44,1740.17) 4336.31,1616.31 4355,1635 ccw(c4198.08,1791.92) 4420,1791.92 v2(4420,1840) cw(c4580,1840) 4427.08,1887.08 cw(c4580,1840) 4532.92,1992.92 cw(c4580,1840) 4580,2000 U10.3@4591.73,2000
  Interconnects w7: v2(4120,1900) 4134.04,1885.96 ccw(c4245,1996.92) 4134.08,1885.92 ccw(c4245,1996.92) 4245,1840 v2(4420,1840)
U8_S3: C24.2 R24.1 RL5.1 U10.4 | length 1142.6
  Top Layer w7: C24.2@4065,1852.56 v2(4065,1900) R24.1@4065,1947.44 ; RL5.1@4225,1502.56 cw(c4262.44,1502.56) 4262.44,1540 ccw(c4262.44,1630.68) 4326.56,1566.56 4365.15,1605.15 ccw(c4160.29,1810) v2(4450,1810) cw(c4590,1810) 4590,1950 U10.4@4591.73,1950
  Interconnects w7: v2(4065,1900) 4098.43,1866.57 ; v2(4450,1810) 4235,1810 cw(c4235,2003.14) 4098.47,1866.53 ; 4098.43,1866.57 ccw(c4235,2003.14) 4098.47,1866.53
pads on no net: L1.4 L2.4 N1.1 U1.5 U1_ATTEN1.0 U1_ATTEN1.7 U1_ATTEN1.8 U1_ATTEN2.0 U1_ATTEN2.7 U1_ATTEN2.8 U1_ATTEN3.0 U1_ATTEN3.7 U1_ATTEN3.8 U1_ATTEN4.0 U1_ATTEN4.7 U1_ATTEN4.8 U1_ATTEN5.0 U1_ATTEN5.7 U1_ATTEN5.8 U2.8 U2.12 U2.14 U10.9

## Polygon pours and split planes (outlines as drawn)
3V3 on Interconnects "Bottom Layer-No Net" (solid, pour order 45): 1050,1050 6450,1050 6450,3950 1050,3950 1050,1050
GND on Gnd 1 "Bottom Layer-No Net" (solid, pour order 46): 1050,1050 6450,1050 6450,4450 1050,4450 1050,1050
GND on Gnd 2 "Bottom Layer-No Net" (solid, pour order 44): 1050,1050 1050,4450 6450,4450 6450,1050 1050,1050
no net on Bottom Solder "Bottom Layer-No Net" (solid): 6500.41,1000.76 1000.41,1000.76 1000.41,4050.76 6500.41,4050.76 6500.41,1000.76
GND on Top Layer "Bottom Layer-No Net" (solid, pour order 35): 1870.44,1517.45 1870.44,1407.45 1950,1407.45 1950,1517.45
GND on Top Layer "Bottom Layer-No Net" (solid, pour order 43): 2345,2391.3 2355,2391.3 2355,2456.3 2385,2486.3 2385,2592.44 2315,2592.44 2315,2486.3 2345,2456.3
GND on Top Layer "Bottom Layer-No Net" (solid, pour order 42): 2345,3116.3 2355,3116.3 2355,3181.3 2385,3211.3 2385,3317.44 2315,3317.44 2315,3211.3 2345,3181.3
GND on Top Layer "Bottom Layer-No Net" (solid, pour order 41): 3294.43,2196.63 3304.43,2196.63 3304.43,2261.63 3334.43,2291.63 3334.43,2397.77 3264.43,2397.77 3264.43,2291.63 3294.43,2261.63
GND on Top Layer "Bottom Layer-No Net" (solid, pour order 39): 3295,1573.86 3305,1573.86 3305,1638.86 3335,1668.86 3335,1775 3265,1775 3265,1668.86 3295,1638.86
GND on Top Layer "Bottom Layer-No Net" (solid, pour order 34): 2497.46,2252.54 2440,2310 2410,2310 2410,2265 2390,2265 2390,2100 2497.46,2100
GND on Top Layer "Bottom Layer-No Net" (solid, pour order 33): 2498.73,2976.27 2441.27,3033.73 2411.27,3033.73 2411.27,2988.73 2391.27,2988.73 2391.27,2823.73 2498.73,2823.73
GND on Top Layer "Bottom Layer-No Net" (solid, pour order 30): 3447.46,1435.1 3390,1492.56 3360,1492.56 3360,1447.56 3340,1447.56 3340,1282.56 3447.46,1282.56
GND on Top Layer "Bottom Layer-No Net" (solid, pour order 28): 1690,2565 1690,2735 1845,2735 1860,2735 1860,2670 1860,2565 1690,2565
GND on Top Layer "Bottom Layer-No Net" (solid, pour order 32): 3446.88,2057.87 3389.43,2115.33 3359.43,2115.33 3359.43,2070.33 3339.43,2070.33 3339.43,1905.33 3446.88,1905.33
GND on Top Layer "Bottom Layer-No Net" (solid, pour order 38): 2675,1800 2080,1800 2080,1550 2175,1550 2375,1350 2375,1175 3025,1175 3025,1450
GND on Top Layer "Bottom Layer-No Net" (solid, pour order 31): 5101.46,2508.32 5044,2565.77 5014,2565.77 5014,2520.77 4994,2520.77 4994,2355.77 5101.46,2355.77
GND on Top Layer "Bottom Layer-No Net" (solid, pour order 40): 4949,2647.07 4959,2647.07 4959,2712.07 4989,2742.07 4989,2848.21 4919,2848.21 4919,2742.07 4949,2712.07
no net on Top Solder "Bottom Layer-No Net" (solid): 2095,1495 2035,1495 2035,1325 2115,1325 2115,1495
no net on Top Solder "Bottom Layer-No Net" (solid): 2185,2275 2240,2330 2240,2365 2180,2425 2000,2425 1870,2555 1675,2555 1675,2450 1850,2275
no net on Top Solder "Bottom Layer-No Net" (solid): 1125,3420 1125,3360 1720,3360 1720,3440 1125,3440
no net on Top Solder "Bottom Layer-No Net" (solid): 1125,2571.62 1125,2505 1550,2505 1550,2593.82 1125,2593.82
no net on Top Solder "Bottom Layer-No Net" (solid): 1125,3020 1125,2960 1590,2960 1590,3040 1125,3040
no net on Top Solder "Bottom Layer-No Net" (solid): 1125,1947.5 1125,1880 1985,1880 1985,1970 1125,1970
no net on Top Solder "Bottom Layer-No Net" (solid): 6500,4500 6500,4050 5950,4050 1000,4050 1000,4500
no net on Top Solder "Bottom Layer-No Net" (solid): 3930,2330 3930,2650 6425,2650 6425,2330
no net on Top Solder "Bottom Layer-No Net" (solid): 3705,2515 2815,2515 2725,2425 2520,2425 2465,2370 2465,2320 2510,2275 2775,2275 2920,2420 3705,2420
no net on Top Solder "Bottom Layer-No Net" (solid): 3830,2675 4025,2870 4025,3140 3960,3140 3450,3650 1750,3650 1625,3525 1625,3175 1490,3040 1490,2960 1635,2960 2000,3325 2090,3325 2090,3175 1990,3175 1675,2860 1675,2725 1575,2725 1500,2650 1500,2450 1675,2450 1675,2745 1860,2745 1900,2785 1900,2850 2045,2995 2180,2995 2230,3045 2230,3100 2155,3175 2090,3175 2090,3325 2075,3325 2125,3375 2575,3375 2610,3340 2610,3190 2565,3145 2520,3145 2475,3100 2475,3045 2520,3000 2675,3000 2850,2825 3500,2825 3650,2675
no net on Top Solder "Bottom Layer-No Net" (solid): 3905,2525 3905,2105 3875,2075 3875,1625 3715,1465 3455,1465 3420,1500 3420,1550 3495,1625 3575,1625 3750,1800 3750,2050 3700,2100 3440,2100 3410,2130 3410,2170 3510,2270 3565,2270 3600,2305 3600,2475 3650,2525
no net on Top Solder "Bottom Layer-No Net" (solid): 3085,2225 2975,2225 2800,2050 2625,2050 2545,1970 1675,1970 1675,1880 2805,1880 2975,2050 3055,2050 3135,2130 3135,2175

## Other copper
Top Layer:
  region net 3V3: 5554.88,3565 5554.88,3435 5614.88,3435 5614.88,3565
  region net GND: 5245.12,3435 5245.12,3565 5185.12,3565 5185.12,3435
  region net GND: 3875,3225 3875,3150 3975,3150 3975,3225
  rectangle net GND: 2940,2960 3090,3040
  rectangle net GND: 3175,2725 3250,2825
  rectangle net GND: 2254.71,3347.99 2454.71,3394.99
  rectangle net GND: 2254.71,3437.99 2454.71,3514.99
  rectangle net GND: 5635,2880 5760,2940
  rectangle net GND: 4335,2880 4460,2940
  rectangle net 3V3: 4360,2730 4435,2825
  rectangle net 3V3: 5660,2730 5735,2825
  rectangle net GND: 4065,2640 4225,2815
  rectangle net GND: 5345,2640 5505,2815
  pour cut-out: 1816.11,2680.8 1780,2680.8 1780,2619.29 1816.57,2619.29
  pour cut-out: 1798.49,2537 1798.49,2595.51 1789,2605 1789,2630.24 1757,2630.24 1757,2605 1747.51,2595.51 1747.51,2537
  pour cut-out: 1747.51,2763 1747.51,2704.49 1757,2695 1757,2669.76 1789,2669.76 1789,2695 1798.49,2704.49 1798.49,2763
  pour cut-out: 1660,2624.51 1718.51,2624.51 1728,2634 1753.24,2634 1753.24,2666 1728,2666 1718.51,2675.49 1660,2675.49
Interconnects:
  pour cut-out: 5650,1550 5650,1325 5150,1325 5150,1550
  pour cut-out: 5750,1550 5975,1550 5975,1325 5750,1325

## Silkscreen, mask and mechanical layers (free items; w line width, h text height)
Top Overlay:
  lines w10: 1000,4000 6500,4000 ; 1000,4050 6500,4050 ; 1000,1000 1000,4500 6500,4500 6500,1000 1000,1000
  text "Impedance Characterization Test line" at 2585,4105 h60
  text "EORE Integrated system - R4" at 2575,3770 h70
  text "R4" at 5940,3280 h60
  text "SVN:" at 5935,3195 h60
  text ".VersionControl_RevNumber" at 6155,3195 h60
  text ".Print_Date" at 5935,3110 h60
  text "SR CS" at 5625,2312.44 h45 r90
  text "AT1CS" at 5700,2312.44 h45 r90
  text "AT2CS" at 5780,2312.44 h45 r90
  text "AT4CS" at 5855,2312.44 h45 r90
  text "AT5CS" at 5925,2312.44 h45 r90
  text "AT3CS" at 5995,2312.44 h45 r90
  text "15V" at 6210,1665 h45 r90
  text "3.3V" at 4605,1100 h45 r90
  text "SQ2 P1" at 4100,1030 h45 r90
  text "SQ8 P1" at 4170,1030 h45 r90
  text "SQ2 P3" at 3945,1025 h45 r90
  text "SQ2 P2" at 4020,1025 h45 r90
  text "SQ8 P2" at 4245,1025 h45 r90
  text "DBG 1" at 4325,1025 h45 r90
  text "DBG 2" at 4400,1025 h45 r90
  text "DBG 2" at 4470,1025 h45 r90
Top Paste:
  lines w10: 1000,1000 1000,4000 6500,4000 6500,1000 1000,1000
Top Solder:
  drawing of 46 lines, arcs and shapes, not listed
Bottom Solder:
  drawing of 89 lines, arcs and shapes, not listed
Mechanical 2:
  the board outline again, w8
Mechanical 15:
  lines w8: 1060,1060 1200,1200 ; 1060,1340 1200,1200 ; 1060,3660 1200,3800 ; 1060,3940 1200,3800 ; 1340,1060 1200,1200 ; 1340,1340 1200,1200 ; 1340,3660 1200,3800 ; 1340,3940 1200,3800 ; 2560,3660 2700,3800 ; 2560,3940 2700,3800 ; 2840,3660 2700,3800 ; 2840,3940 2700,3800 ; 6160,1060 6300,1200 ; 6160,1340 6300,1200 ; 6160,3660 6300,3800 ; 6160,3940 6300,3800 ; 6440,1060 6300,1200 ; 6440,1340 6300,1200 ; 6440,3660 6300,3800 ; 6440,3940 6300,3800

## Dimensions
1200,1200 to 1200,3800 on Mechanical 1
1200,1200 to 1200,3200 on Mechanical 1
1200,1200 to 1200,2775 on Mechanical 1
1200,1200 to 1200,2250 on Mechanical 1
6300,1200 to 6300,3800 on Mechanical 1
6300,2850 to 6300,1200 on Mechanical 1
6300,1200 to 6300,2350 on Mechanical 1
6300,1200 to 5900,1490 on Mechanical 1
6300,1200 to 5900,1390 on Mechanical 1
6300,1200 to 5200,1490 on Mechanical 1
6300,1200 to 5900,1390 on Mechanical 1
1000,1000 to 1000,4000 on Mechanical 1
1000,1000 to 1040,1925 on Mechanical 1
1000,1000 to 1040,2550 on Mechanical 1
1000,1000 to 1040,3000 on Mechanical 1
1000,1000 to 1040,3400 on Mechanical 1
6500,1000 to 6460,2600 on Mechanical 1
1000,1000 to 6500,1000 on Mechanical 1
1200,1200 to 1000,1000 on Mechanical 1